# EAGLE board circuit_scheme (EAGLE 9.7.0)

Size 127.9 x 178.28 mm. Coordinates in mm from the lower left corner, seen from the top.
Outline: 0,0 127.91,0 127.91,178.28 0,178.28 0,0
Copper layers (1*16): Top 0.035mm / dielectric 1.5mm / Bottom 0.035mm
Design rules "default": minimum track width 6mil, minimum drill 0.35mm, track to track 6mil, track to pad 6mil, pad to pad 6mil, via to via 6mil, smd to smd 6mil, copper to edge 40mil, drill to drill 6mil, minimum pad ring 10mil, minimum via ring 8mil, stop-mask expansion 4mil, vias tented up to drill 0mil, thermal gap 10mil

## Footprints (pad centres in the part's own frame; a part is rotated, then mirrored left to right if it is on the bottom)
LEDRD254W60D565H860B = drill 0.981 pad 1.581: 1 -1.27,0; 2 1.27,0
1X08 = drill 1.016 long: 1 -8.89,0; 2 -6.35,0; 3 -3.81,0; 4 -1.27,0; 5 1.27,0; 6 3.81,0; 7 6.35,0; 8 8.89,0
PIEZO = drill 1 pad 1.6: 1 -3.5,0; 2 3.5,0
RESAD1016W63L850D250B = drill 0.83 pad 1.43: 1 -5.08,0; 2 5.08,0
HA-06-SM065 = drill 1 pad 1.676: 1 -2.54,-2.54; 2 0,2.54; 3 2.54,-2.54
SWITCH-MOMENTARY-PTH-6.5MM = drill 1.016 pad 1.88: 1 -3.251,2.261; 2 3.251,2.261; 3 -3.251,-2.261; 4 3.251,-2.261
ARDUINO-UNO-R3-SHIELD = drill 1.016 pad 1.88: 3.3V 24.13,-2.54; 5V 24.13,0; A0 24.13,12.7; A1 24.13,15.24; A2 24.13,17.78; A3 24.13,20.32; A4 24.13,22.86; A5 24.13,25.4; AREF -24.13,-13.97; D2 -24.13,20.32; D3 -24.13,17.78; D4 -24.13,15.24; D5 -24.13,12.7; D6 -24.13,10.16; D7 -24.13,7.62; D8 -24.13,3.81; D9 -24.13,1.27; D10 -24.13,-1.27; D11 -24.13,-3.81; D12 -24.13,-6.35; D13 -24.13,-8.89; GND@0 24.13,2.54; GND@1 24.13,5.08; GND@2 -24.13,-11.43; IOREF 24.13,-7.62; NC 24.13,-10.16; RES 24.13,-5.08; RX -24.13,25.4; SCL -24.13,-19.05; SDA -24.13,-16.51; TX -24.13,22.86; VIN 24.13,7.62
LCD-I2C = drill 1.016 long: 1 -19.05,-5.08; 2 -19.05,-7.62; 3 -19.05,-10.16; 4 -19.05,-12.7
DIP762W53P254L1969H508Q16B = drill 0.743 pad 1.343: 1 -3.81,8.89; 2 -3.81,6.35; 3 -3.81,3.81; 4 -3.81,1.27; 5 -3.81,-1.27; 6 -3.81,-3.81; 7 -3.81,-6.35; 8 -3.81,-8.89; 9 3.81,-8.89; 10 3.81,-6.35; 11 3.81,-3.81; 12 3.81,-1.27; 13 3.81,1.27; 14 3.81,3.81; 15 3.81,6.35; 16 3.81,8.89

## Placement (x,y rotation side)
D1  RED  [LEDRD254W60D565H860B]  112.51,89.57 180 top
JP1  PINHD-1X08_1X08M  [1X08]  56.63,89.57 180 top
JP2  PINHD-1X08_1X08M  [1X08]  56.63,71.79 180 top
PIEZO1  PIEZO  [PIEZO]  13.58,91.99 90 top
R1  1k  [RESAD1016W63L850D250B]  106.16,87.03 0 top
R2  1k  [RESAD1016W63L850D250B]  68.06,92.11 0 top
RPOT1  250k  [HA-06-SM065]  83.3,76.87 0 top
S1  SWITCH_MOMENTARY  [SWITCH-MOMENTARY-PTH-6.5MM]  118.86,80.68 90 top
S2  SWITCH_MOMENTARY  [SWITCH-MOMENTARY-PTH-6.5MM]  106.16,80.68 90 top
S3  SWITCH_MOMENTARY  [SWITCH-MOMENTARY-PTH-6.5MM]  96,80.68 90 top
U1  ARDUINO-UNO-R3-SHIELD  [ARDUINO-UNO-R3-SHIELD]  84.19,148.43 270 top
U2  LCD-16X2-I2CSUNFOUNDER-IIC  [LCD-I2C]  72.28,36.63 0 top
U3  L293E  [DIP762W53P254L1969H508Q16B]  56.63,80.68 90 top

## Library data of the parts
D1 = Tinkercad; CATEGORY: Opto-Electronic; SUB-CATEGORY: LED; VALUE: LED_RED
JP1 JP2 PIEZO1 R1 R2 RPOT1 S1-S3 U1-U3 = Tinkercad

## Nets
D1_C: D1.2 R1.2
U1_5V: RPOT1.3 U1.5V U2.2 U3.9
U1_A0: RPOT1.2 U1.A0
U1_A4: U1.A4 U2.3
U1_A5: U1.A5 U2.4
U1_D2: S3.3 S3.4 U1.D2
U1_D4: S1.3 S1.4 U1.D4
U1_D6: D1.1 U1.D6
U1_D8: S2.3 S2.4 U1.D8
U1_D11: R2.2 U1.D11
U1_D12: U1.D12 U3.11
U1_GND: R1.1 RPOT1.1 S1.1 S1.2 S2.1 S2.2 S3.1 S3.2 U1.GND@0 U1.GND@1 U1.GND@2 U2.1 U3.2
U3_3A: R2.1 U3.10
U3_4Y: PIEZO1.2 U3.14
U3_GND1: U3.4 U3.5 U3.12 U3.13
U3_VCC1: PIEZO1.1 U3.16

## Tracks (layer width: path | path; a pad name or v marks a point on that pad's centre or on a via)
D1_C  (1 unrouted)
U1_5V  (3 unrouted)
U1_A0  (1 unrouted)
U1_A4  (1 unrouted)
U1_A5  (1 unrouted)
U1_D2  (2 unrouted)
U1_D4  (2 unrouted)
U1_D6  (1 unrouted)
U1_D8  (2 unrouted)
U1_D11  (1 unrouted)
U1_D12  (1 unrouted)
U1_GND  (12 unrouted)
U3_3A  (1 unrouted)
U3_4Y  (1 unrouted)
U3_GND1  (3 unrouted)
U3_VCC1  (1 unrouted)